# EAGLE board 3PDT Board (EAGLE 9.2.2)
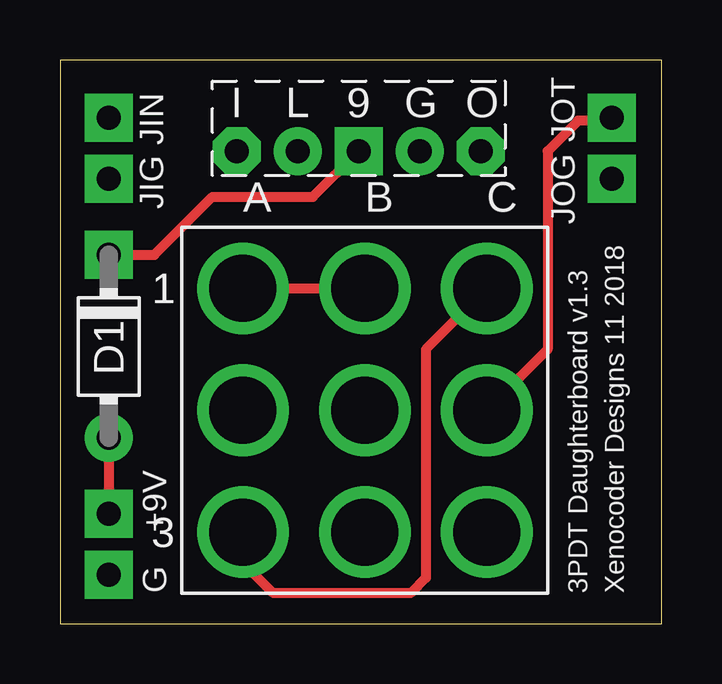
[diagram p0: board, top side]
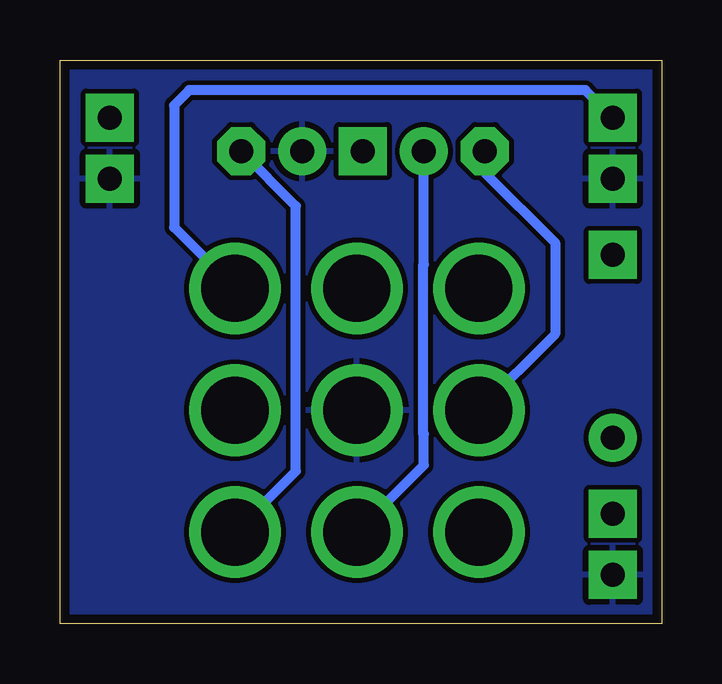
[diagram p1: board, bottom side, seen from below]

Size 25.07 x 23.48 mm. Coordinates in mm from the lower left corner, seen from the top.
Outline: 0,0 25.07,0 25.07,23.48 0,23.48 0,0
Copper layers (1*16): Top 0.035559375mm / dielectric 1.6mm / Bottom 0.035559375mm
Design rules "oshpark-2layer": minimum track width 6mil, minimum drill 10mil, track to track 6mil, track to pad 6mil, pad to pad 6mil, via to via 6mil, smd to smd 6mil, copper to edge 15mil, drill to drill 6mil, minimum pad ring 5mil, minimum via ring 5mil, stop-mask expansion 2.5mil, vias tented up to drill 0mil, thermal gap 10mil
Net classes: 0 default: clearance 0.205 mm

## Footprints (pad centres in the part's own frame; a part is rotated, then mirrored left to right if it is on the bottom)
SQUARE = drill 1 pad 2 square: 1 0,0
DO41-3 = drill 1 pad 2: A 3.81,0 | drill 1 pad 2 square: C -3.81,0
3PDT = drill 2.8 pad 2: A1 -5.08,5.08; A2 -5.08,0; A3 -5.08,-5.08; B1 0,5.08; B2 0,0; B3 0,-5.08; C1 5.08,5.08; C2 5.08,0; C3 5.08,-5.08
BOARDLINK = drill 1 pad 2 octagon: 1 -2.54,0; 5 7.62,0 | drill 1 pad 2: 2 0,0; 4 5.08,0 | drill 1 pad 2 square: 3 2.54,0

## Placement (x,y rotation side)
+9V  +9V(T)  [SQUARE]  2.03,4.57 0 top
D1  [DO41-3]  2.03,11.56 270 top
G  GND(T)  [SQUARE]  2.03,2.03 0 top
JIG  GND(T)  [SQUARE]  2.03,18.54 0 top
JIN  [SQUARE]  2.03,21.08 0 top
JOG  GND(T)  [SQUARE]  22.99,18.54 0 top
JOT  [SQUARE]  22.99,21.08 0 top
SW2  3PDT  [3PDT]  12.7,8.89 0 top
U$1  BOARDLINK  [BOARDLINK]  9.91,19.68 0 top

## Library data of the parts
+9V G JIG JIN JOG JOT = mb_supply
D1 = mb_diodes
SW2 = mb_switches
U$1 = xc_library

## Nets
+9V: +9V.1 D1.A
GND: G.1 JIG.1 JOG.1 SW2.B2 U$1.4
N$1: SW2.B3 U$1.2
N$2: JOT.1 SW2.C2
N$3: SW2.A1 SW2.B1
N$4: JIN.1 SW2.A3 SW2.C1
N$5: SW2.A2 U$1.1
N$6: SW2.C3 U$1.5
N$7: D1.C U$1.3

## Tracks (layer width: path | path; a pad name or v marks a point on that pad's centre or on a via)
+9V
  Top 0.406: D1.A +9V.1
GND
  pour Bottom: 0,23.5 0,0 25.27,0 25.27,23.5
N$1
  Bottom 0.406: SW2.B3 9.91,6.6 9.91,7.9 9.94,7.93 9.94,14.93 9.91,14.96 U$1.2
N$2
  Top 0.406: JOT.1 22.86,20.95 21.59,20.95 20.32,19.68 20.32,11.43 SW2.C2
N$3
  Top 0.406: SW2.A1 SW2.B1
N$4
  Top 0.406: SW2.A3 7.62,2.54 8.89,1.27 14.61,1.27 15.24,1.91 15.24,11.43 SW2.C1
  Bottom 0.406: JIN.1 3.17,22.23 19.68,22.23 20.32,21.59 20.32,16.51 SW2.C1
N$5
  Bottom 0.406: U$1.1 7.37,18.8 4.45,15.88 4.45,12.06 SW2.A2
N$6
  Bottom 0.406: SW2.C3 15.24,6.35 15.24,17.4 U$1.5
N$7
  Top 0.406: D1.C 3.94,15.37 6.35,17.78 10.54,17.78 U$1.3

## Text on the board
tNames: 3PDT Daughterboard v1.3 | Xenocoder Designs 11 2018